# Altium PCB nrf52840_bma250e.PcbDoc
Units mil, origin at the board's own origin, x right, y up, seen from the top; angles counter-clockwise.
Board outline 2305 x 782 mil, 2 copper layers (Top Layer, Bottom Layer), stack 12.8 mil thick; 27 components, 63 nets, 155 pads, 88 vias.
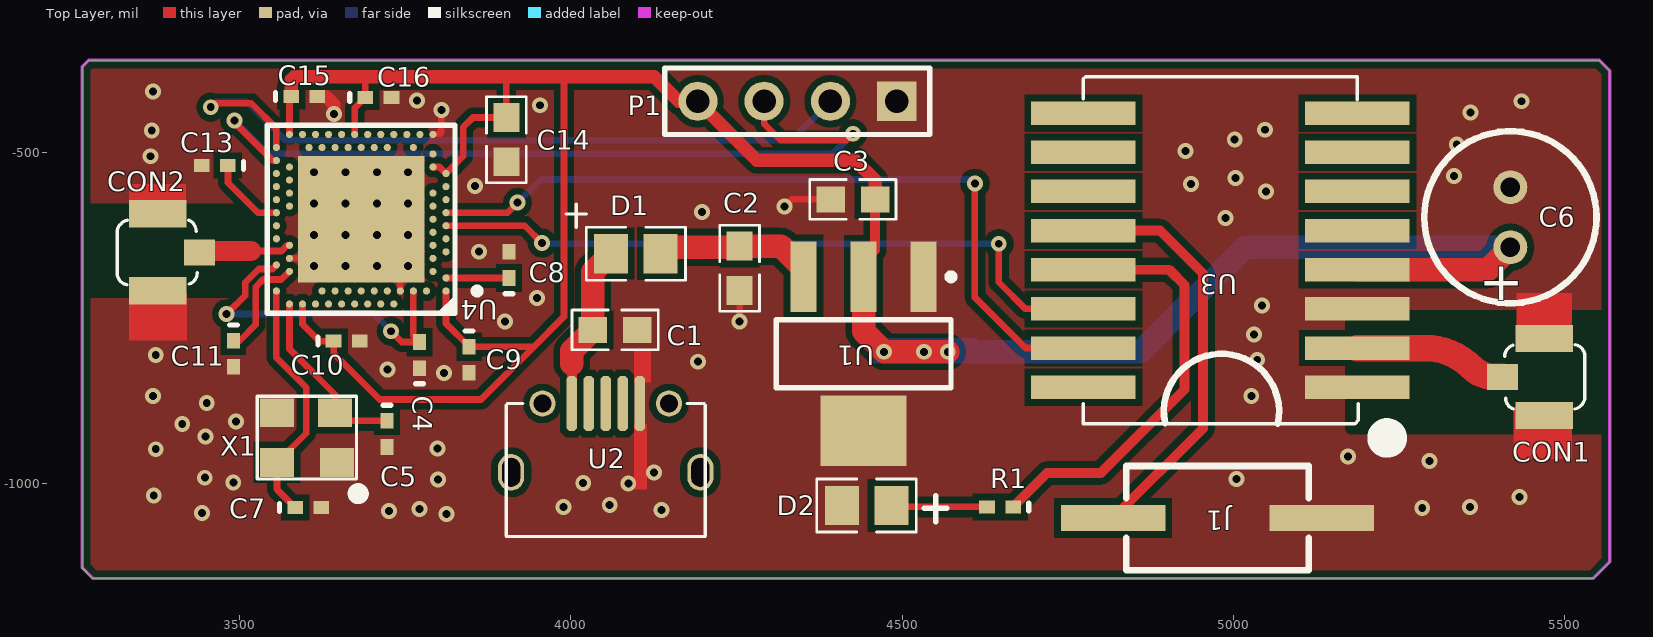
[diagram p0: Top Layer view]
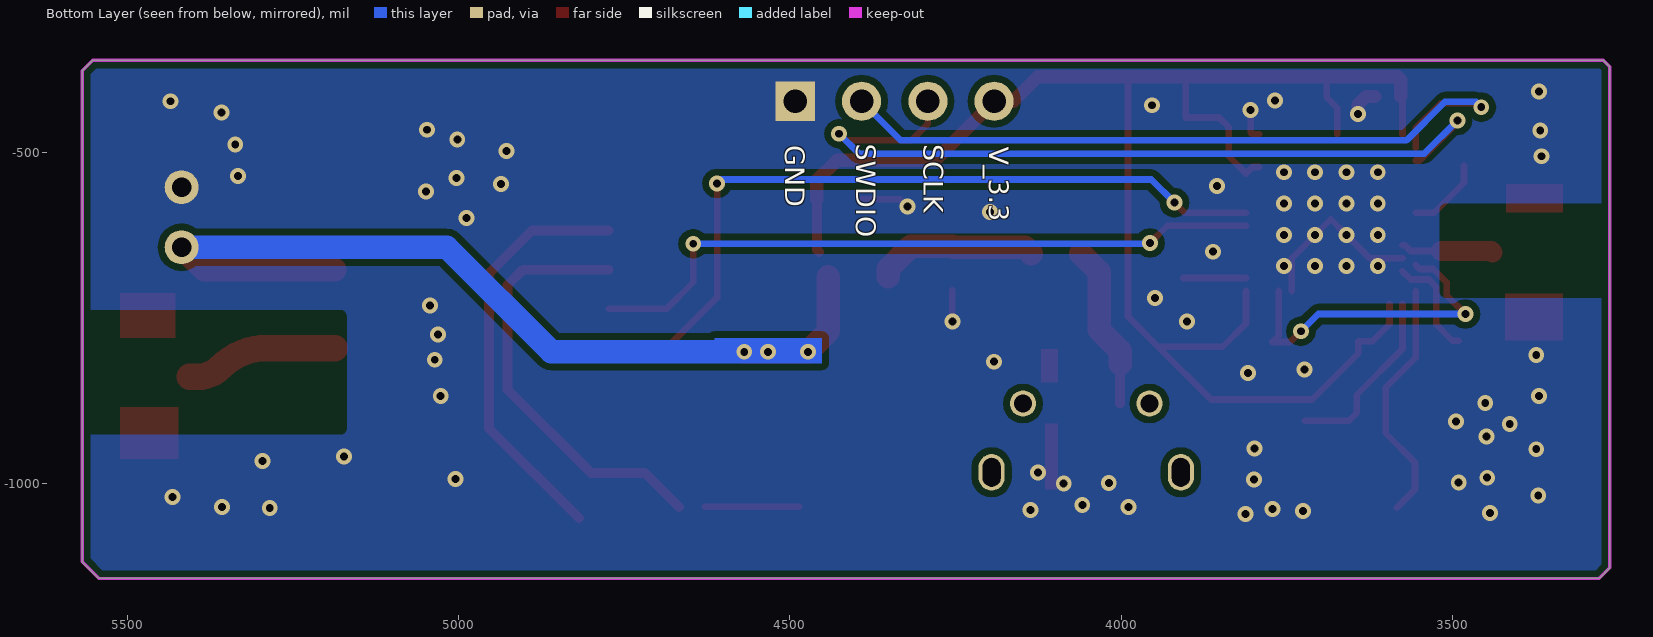
[diagram p1: Bottom Layer view, seen from below]

## Layer stack, top to bottom
Top Layer: signal copper 1.4
Dielectric: core 10, FR-4, Dk 4.2
Bottom Layer: signal copper 1.4

## Board outline
3263,-1127 3263,-371 3273,-361 5552,-361 5568,-377 5568,-1118 5543,-1143 3279,-1143

## Design rules (kind name [scope] priority, off if disabled: settings)
Clearance [All] p1: gap=6
ComponentClearance [All] p1 off: gap=10 collisioncheckmode=3 verticalgap=10 showdistances=FALSE
Height [All] p1 off: minheight=0 maxheight=1000 prefheight=500
MinimumSolderMaskSliver [All] p1 off: minsoldermaskwidth=10
NetAntennae [All] p1 off: netantennaetolerance=0
PlaneConnect [All] p1: planeconnectstyle=Direct reliefexpansion=20 reliefentries=4 reliefconductorwidth=10 reliefairgap=10
PolygonConnect [All] p1: connectstyle=Direct reliefconductorwidth=10 reliefentries=4 polygonreliefangle="90 Angle"
RoutingVias [All] p1: holewidth=28 width=50 viastyle="Through Hole" minholewidth=28 minwidth=50 maxholewidth=28 maxwidth=50
SilkToSilkClearance [All] p1 off: silktosilkclearance=10
SilkscreenOverComponentPads SilkToSolderMaskClearance [IsPad] p1 off: minsilkscreentomaskgap=10
SolderMaskExpansion [All] p1: expansion=4
Width [All] p1: maxlimit=100 minlimit=1 preferedwidth=10 minimp=50.000000 maximp=50.000000 favimp=50.000000
21 further rules are at their usual default settings.

## Components (designator, comment, footprint, x,y, rotation, side; value= is the part's Value field where it differs from the comment)
C1 "2.2uF" 0603-1 4067,-768 r0 top
C2 "1uF" 0603-1 4255,-675 r270 top
C3 "1uF" 0603-1 4426,-571 r180 top
C4 "1.0μF" 0402-A 3772,-806 r90 top
C5 "12pF" 0402-A 3723,-925 r270 top
C6 "100uf/25V" C_6.5_12.5_2.2_0.5 5418,-598 r270 top
C7 "12pF" 0402-A 3604,-1036 r0 top
C8 "100nF" 0402-A 3907,-670 r90 top
C9 "1.0μF" 0402-A 3847,-813 r270 top
C10 "100nF" 0402-A 3662,-785 r0 top
C11 "100pF" 0402-A 3491,-804 r270 top
C13 "820pF" 0402-A 3463,-520 r180 top
C14 "4.7μF" 0603-1 3903,-481 r270 top
C15 "100nF" 0402-a 3598,-416 r0 top
C16 "100nF" 0402-a 3710,-417 r0 top
CON1 "SMA/UFLR" IPX_U.FL 5469,-839 r180 top
CON2 "SMA/UFLR" IPX_U.FL 3377,-651 r0 top
D1 "Diode 1N4148" 0805-1 4061,-653 r0 top
D2 "LED/RED" 0805-1 4484,-1033 r180 top
J1 "KEY" BUTTON_1 4976,-1052 r180 top
P1 "Header 4" HDR1X4 4492,-423 r180 top
R1 "500R" 0402-a 4648,-1035 r180 top
U1 "AMS1117-3.3" SOT223_M 4442,-804 r270 top
U2 "USB_Micro" usb_micro 4053,-879 r180 top
U3 "HC-25_wifi" HC-25 5187,-441 r180 top
U4 "nRF52840-QIAA" AQFN50P700X700X85_HS-74N 3684,-601 r180 top
X1 "32MHz" SMD3225 3557,-968 r0 top

## Footprints (in the part's own frame and the unit in brackets; to place one, negate y for a bottom-side part, rotate by r counter-clockwise, add the part's x,y. Pads: shape width x height; smd on the part's side, far side on the other; paste and mask are expansions set on the pad)
0402-A [mm] "Chip Inductor; Body 1 x 0.5 mm (LxW typ)"
  rect 0.6x0.5 smd: 1(-0.5,0) 2(0.5,0)
  silkscreen extent -1.1,-0.15 -1.1,0.15
0402-a [mm] "Chip Inductor; Body 1 x 0.5 mm (LxW typ)"
  rect 0.6x0.5 smd: 1(-0.5,0) 2(0.5,0)
  silkscreen extent -1.1,-0.15 -1.1,0.15
0603-1 [mm]
  rect 1.1x1 smd: 1(-0.85,0) 2(0.85,0)
  silkscreen extent -1.65,-0.76 1.65,0.76, body extent -1.14,-0.38 1.14,0.38, height 1
0805-1 [mm]
  rect 1.3x1.5 smd: 1(0,0) 2(1.9,0)
  silkscreen extent -1.72,-1.02 2.85,1.91
AQFN50P700X700X85_HS-74N [mm]
  rect 4.85x4.85 smd mask+0.05: 74(0,0)
  round 0.275 smd paste+0.012 mask+0.05: A8(-1.25,3.25) A10(-0.75,3.25) A12(-0.25,3.25) A14(0.25,3.25) A16(0.75,3.25) A18(1.25,3.25) A20(1.75,3.25) A22(2.25,3.25) A23(2.75,3.25) AA24(3.25,-2.25) AB2(-2.75,-2.5) AC5(-2,-2.75) AC9(-1,-2.75) AC11(-0.5,-2.75) AC13(0,-2.75) AC15(0.5,-2.75) AC17(1,-2.75) AC19(1.5,-2.75) AC21(2,-2.75) AC24(3.25,-2.75) AD2(-2.75,-3.25) AD4(-2.25,-3.25) AD6(-1.75,-3.25) AD8(-1.25,-3.25) AD10(-0.75,-3.25) AD12(-0.25,-3.25) AD14(0.25,-3.25) AD16(0.75,-3.25) AD18(1.25,-3.25) AD20(1.75,-3.25) AD22(2.25,-3.25) AD23(2.75,-3.25) B1(-3.25,2.75) B3(-2.5,2.75) B5(-2,2.75) B7(-1.5,2.75) B9(-1,2.75) B11(-0.5,2.75) B13(0,2.75) B15(0.5,2.75) B17(1,2.75) B19(1.5,2.75) B24(3.25,2.75) C1(-3.25,2.25) D2(-2.75,2) D23(2.75,2) E24(3.25,1.75) F2(-2.75,1.5) F23(2.75,1.5) G1(-3.25,1.25) H2(-2.75,1) H23(2.75,1) J1(-3.25,0.75) J24(3.25,0.75) K2(-2.75,0.5) L1(-3.25,0.25) L24(3.25,0.25) M2(-2.75,0) N1(-3.25,-0.25) N24(3.25,-0.25) P2(-2.75,-0.5) P23(2.75,-0.5) R1(-3.25,-0.75) R24(3.25,-0.75) T2(-2.75,-1) T23(2.75,-1) U1(-3.25,-1.25) U24(3.25,-1.25) V23(2.75,-1.5) W1(-3.25,-1.75) W24(3.25,-1.75) Y2(-2.75,-2) Y23(2.75,-2)
  silkscreen extent -4.57,-3.6 3.6,3.6, body extent -3.55,-3.55 3.55,3.55, height 0.85
BUTTON_1 [mm]
  rect 4x1 smd: 1(-4,0) 2(4,0)
  silkscreen extent -3.5,-2 3.5,2
C_6.5_12.5_2.2_0.5 [mm]
  round 1.3 hole 0.75: 1(1.15,0) 2(-1.15,0)
  silkscreen extent -3.3,-3.3 3.3,3.3
HC-25 [mm]
  rect 4x0.9 smd: 1(0,10.5) 2(0,9) 3(0,7.5) 4(0,6) 5(0,4.5) 6(0,3) 7(0,1.5) 8(0,0) 9(10.5,0) 10(10.5,1.5) 11(10.5,3) 12(10.5,4.5) 13(10.5,6) 14(10.5,7.5) 15(10.5,9) 16(10.5,10.5)
  silkscreen extent -1.5,-1.4 10.5,12.8
HDR1X4 [mm] "Connector; Header; 4 Position"
  rect 1.5x1.5 hole 0.9: 1(0,0)
  round 1.5 hole 0.9: 2(2.54,0) 3(5.08,0) 4(7.62,0)
  silkscreen extent -1.27,-1.27 8.89,1.27
IPX_U.FL [mm]
  rect 1.2x1 smd: 1(1.6,0)
  rect 2.2x1.05 smd: 2(0,-1.475) 3(0,1.475)
  silkscreen extent -1.55,-1.24 1.51,1.23
SMD3225 [mm]
  rect 1.3x1.1 smd: 1(0,0) 2(2.3,0) 3(2.23,1.9) 4(0,1.9)
  silkscreen extent -0.76,-1.32 3.24,2.54
SOT223_M [mm] "SOT223, 4-Leads, Body 6.5x3.5mm, Pitch 2.3mm, Lead Span 7mm, IPC Low Density"
  rect 2.7x1 smd: 1(-2.95,2.3) 2(-2.95,0) 3(-2.95,-2.3)
  rect 2.7x3.3 smd: 4(2.95,0)
  silkscreen extent -3.07,-3.35 1.3,3.48, body extent -1.85,-3.35 1.85,3.35, height 1.7
usb_micro [mm] "USB方?"
  oval 1x1.4 hole 0.7 slot 1.1 at 90 deg: 0(-3.625,2.638) 0(3.625,2.638)
  round 1 hole 0.7: 0(-2.425,0) 0(2.425,0)
  oct 0.4x2.1 smd: 1(1.3,0) 2(0.65,0) 3(0,0) 4(-0.65,0) 5(-1.3,0)
  silkscreen extent -3.81,0 3.81,5.1

## Part data
C1 C2 C3: library part CAP-0.1UF, "SMD-"
C4 C9: library part C0603-1?, "Capacitor, X7R, ±10%"
C5 C7: library part C0402-12p, "Capacitor, NP0, ±2%"
C6: library part "Cap Pol1", "Polarized Capacitor (Radial)"
C8 C10 C15 C16: library part C0402-100n, "Capacitor, X7R, ±10%"
C11: library part C0402-100p, "Capacitor, NP0, ±5%"
C13: library part C0402-820p, "Capacitor, NP0, ±5%"
C14: library part C0603-4μ7-, "Capacitor, X7R, ±10"
D1: "High Conductance Fast Diode"
D2: library part LED/0603
P1: "Header, 4-Pin"
R1: library part R
U1: library part MCP170
U4: library part nRF52840-QIAAD0, "Multi-protocol Bluetooth Low Energy, IEEE 802.15.4, ANT and 2.4GHz proprietary system-on-chip"
X1: library part XTAL_SMD2016_32MHz_8pF_General, "XTAL SMD 2016, 32MHz, Cl=8pF, Total Tol: ±40ppm"

## Via types
v1: diameter 24, hole 12, Top Layer to Bottom Layer, 88 vias

## Nets (pads, with @x,y where several pads share a name; then routed paths per layer and width w, separated by ;. In a path a pad name is that pad's centre, name@x,y a point inside that pad or via, vN(x,y) a via of type N, cw(c..) or ccw(c..) an arc to the next point about the centre after c; other vN are vias at no path point)
DEC1: C8.1 U4.C1 | length 94.9
  Top Layer w10: U4.C1 C8.1@3906.9,-689.58
DEC3: C11.1 U4.D23 | length 161.4
  Top Layer w10: C11.1 3500.69,-784.32 3525,-760 3525,-703 3536,-692 3563.47,-692 U4.D23
DEC4_6: C4.2 U4.B5 U4.E24 | length 506.6
  Top Layer w10: v1(3481,-744) 3509,-716 3509,-696.37 3529.37,-676 3549.94,-676 U4.E24 ; v1(3729,-770) 3745.31,-786.31 C4.2 3762.74,-777.05 U4.B5
  Bottom Layer w10: v1(3481,-744) 3703,-744 v1(3729,-770)
GND: C1.2 C2.2 C3.2 C4.1 C5.2 C6.2 C7.2 C8.2 C9.2 C10.2 C11.2 C13.2 C14.2 C15.2 C16.2 CON1.2 CON1.3 CON2.2 CON2.3 D2.2 J1.1 P1.1 U1.1 U1.4 U2.5 U3.1 U3.3 U4.74 U4.AD2 U4.B7 U4.F23 X1.2 X1.4 | length 478.4
  Top Layer w10: U4.F23 3624.94,-660.06 v1(3660.38,-624.62) U4.74 3743.06,-660.06 U4.B7 ; U4.AD2 3801.95,-473.05 3805,-470 v1(3805,-436) ; v1(4255,-755) C2.2 ; v1(4323,-582) 4334,-571 C3.2
  Top Layer w20: C15.2 3631,-416 3643,-428 v1(3643,-442)
  other v1: 3813,-1046 3444,-1044 3726,-1041 4137,-1040 3772,-1038 5285,-1037 3989,-1035 5357,-1035 4059,-1032 5432,-1020 3371,-1018 4087,-1000 4019,-999 3491,-998 3800,-994 5005,-993 3448,-991 4126,-983 5296,-966 5173,-959 3374,-948 3799,-947 3449,-929 3414,-910 3495,-906 3451,-878 3370,-868 5027,-868 3809,-833 3724,-828 4192,-816 5036,-813 3374,-806 5031,-775 3901,-755 5043,-731 3949,-720 3613.13,-671.87 3660.38,-671.87 3707.62,-671.87 3754.87,-671.87 3862,-650 3613.13,-624.62 3707.62,-624.62 3754.87,-624.62 4988,-599 4198,-590 3613.13,-577.38 3660.38,-577.38 3707.62,-577.38 3754.87,-577.38 5049,-559 3856,-551 4936,-548 5003,-539 5333,-536 3613.13,-530.13 3660.38,-530.13 3707.62,-530.13 3754.87,-530.13 3366,-506 4928,-498 5337,-488 5002,-481 3368,-467 5048,-466 5358,-440 3954,-429 5435,-423 3768,-422 3370,-408
NetC13_1: C13.1 U4.N24 | length 117.1
  Top Layer w10: C13.1@3483,-520.68 3483,-546 3528.16,-591.16 U4.N24
NetCON1_1: CON1.1 U3.2 | length 230.7
  Top Layer w40: U3.2 5288.91,-795.33 cw(c5288.91,-895.33) 5359.62,-824.62 ccw(c5394.34,-789.9) 5394.34,-839 CON1.1
NetCON2_1: CON2.1 U4.H23 | length 140.1
  Top Layer w10: 3518,-649 3563.58,-649 3572.21,-640.37 U4.H23
  Top Layer w30: CON2.1 3441.99,-649 3489,-649 3518,-649
NetD2_1: D2.1 R1.2 | length 142.3
  Top Layer w10: D2.1@4486,-1035 R1.2
NetJ1_2: J1.2 U3.12 | length 632.4
  Top Layer w15: U3.12 4889.17,-618.17 4954,-683 4954,-916.52 J1.2
NetR1_1: R1.1 U3.13 | length 651.5
  Top Layer w15: R1.1 4718.69,-984 4800,-984 4926,-858 4926,-700 4903.22,-677.22 U3.13
NRF52840_RX: U3.15 U4.N1 | length 1188.5
  Top Layer w10: U4.N1 3904.84,-591.16 v1(3920,-576) ; v1(4610,-547) 4610,-719 4686.33,-795.33 U3.15
  Bottom Layer w10: v1(3920,-576) 3955,-541 4604,-541 v1(4610,-547)
NRF52840_TX: U3.14 U4.L1 | length 1047.6
  Top Layer w10: U4.L1 3930.84,-610.84 v1(3957,-637) ; v1(4646,-638) 4646,-696 4686.28,-736.28 U3.14
  Bottom Layer w10: v1(3957,-637) 3958,-638 v1(4646,-638)
P0.02/AIN0: U4.A12
P0.03/AIN1: U4.B13
P0.04/AIN2: U4.J1
P0.05/AIN3: U4.K2
P0.07: U4.M2
P0.09/NFC1: U4.L24
P0.10/NFC2: U4.J24
P0.11: U4.T2
P0.12: U4.U1
P0.13: U4.AD8
P0.14: U4.AC9
P0.15: U4.AD10
P0.16: U4.AC11
P0.17: U4.AD12
P0.18/RESET: U4.AC13
P0.19: U4.AC15
P0.20: U4.AD16
P0.21: U4.AC17
P0.22: U4.AD18
P0.23: U4.AC19
P0.24: U4.AD20
P0.25: U4.AC21
P0.26: U4.G1
P0.27: U4.H2
P0.28/AIN4: U4.B11
P0.29/AIN5: U4.A10
P0.30/AIN6: U4.B9
P0.31/AIN7: U4.A8
P1.00: U4.AD22
P1.01: U4.Y23
P1.02: U4.W24
P1.03: U4.V23
P1.04: U4.U24
P1.05: U4.T23
P1.06: U4.R24
P1.07: U4.P23
P1.08: U4.P2
P1.09: U4.R1
P1.10: U4.A20
P1.11: U4.B19
P1.12: U4.B17
P1.13: U4.A16
P1.14: U4.B15
P1.15: U4.A14
SWDCLK: P1.3 U4.AA24 | length 1238.5
  Top Layer w10: v1(3493,-452) 3493,-455 3550.42,-512.42 U4.AA24 ; P1.3 4292,-457 4317,-482 4416,-482 v1(4426,-472)
  Bottom Layer w10: v1(3493,-452) 3543,-502 4396,-502 v1(4426,-472)
SWDIO: P1.2 U4.AC24 | length 1132.8
  Top Layer w10: v1(3457,-432) 3463,-426 3518,-426 3556.05,-464.05 U4.AC24
  Bottom Layer w10: v1(3457,-432) 3465,-424 3512,-424 3570,-482 4333,-482 P1.2
VBUS_5V: C1.1 D1.1 U2.1 | length 250.5
  Top Layer w15: U2.1 4001.82,-819
  Top Layer w35.43: 4001.82,-819 4001.82,-799.72 C1.1 4033.54,-680.46 D1.1
VCC_33: C3.1 C6.1 C9.1 C10.1 C14.1 C15.1 C16.1 P1.4 U1.2 U3.4 U4.A22 U4.AD14 U4.AD23 U4.B1 U4.W1 U4.Y2 | length 3943.7
  Top Layer w10: U4.AD23 3575.73,-418.58 C15.1 ; U4.A22 3595.42,-759.42 3621,-785 C10.1 3642.31,-803.32 3712,-873 3865,-873 3944.69,-793.32 ; U4.AD14 3674.16,-433.16 C16.1 3690.31,-386.68 ; U4.Y2 3802.11,-522.26 U4.W1 3838,-506.05 3838,-462 3852.46,-447.54 C14.1 3903,-388 ; U4.B1 3811.95,-758.27 C9.1 3944.69,-793.32 ; 3989,-386 3990,-387 3990,-748 3944.69,-793.32
  Top Layer w15: U1.2@4456.26,-650.6 4459.46,-647.39 C3.1
  Top Layer w20: C15.1 3578.31,-390.68 3583,-386 3989,-386 4126,-386 4163,-423 P1.4 4281,-512 4429,-512 4459.46,-542.46 C3.1
  Top Layer w35.43: U1.2 4442,-770 v1(4473,-801) v1(4533,-801) v1(4569,-801) ; U3.4 5384.06,-677.22 C6.1
  Bottom Layer w35.43: v1(4569,-801) 4860,-801 5017.72,-643.28 C6.1
VCC_43: C2.1 D1.2 U1.3 | length 246.7
  Top Layer w35.43: D1.2 4145.8,-643 4253.54,-643 C2.1 4317.28,-641.54 4351.45,-675.71 U1.3
XC1: C7.1 U4.B24 X1.1 | length 374.9
  Top Layer w10: U4.B24 3556.05,-810.05 3601,-855 3601,-924 X1.1 3557,-1008.68 C7.1
XC2: C5.1 U4.A23 X1.3 | length 276.1
  Top Layer w10: U4.A23 3575.73,-796.73 3644.8,-865.8 X1.3 3656.91,-905.32 C5.1
pads on no net: U2.0 U2.2 U2.3 U2.4 U3.5 U3.6 U3.7 U3.8 U3.9 U3.10 U3.11 U3.16 U4.A18 U4.AB2 U4.AC5 U4.AD4 U4.AD6 U4.B3 U4.D2 U4.F2

## Polygon pours and split planes (outlines as drawn)
GND on Top Layer "Bottom Layer-No Net 1" (solid, remove dead copper, pour order 6): 3165,-244 3173,-236 5899,-236 5899,-1250 5755,-1394 5720,-1359 2951,-1359
GND on Bottom Layer "Bottom Layer-No Net 1" (solid, remove dead copper, pour order 8): 3060,-201 6496,-201 6504,-209 6234,-479 6234,-1629 3056,-1629 2982,-1555

## Keep-outs
Keep-Out Layer:
  lines w5: 3263,-1127 3263,-1041 3263,-396 3263,-371 3273,-361 5490,-361 5552,-361 5568,-377 5568,-1118 5543,-1143 3279,-1143 3263,-1127

## Other copper
Top Layer:
  rectangle net GND: 5423,-963 5511,-884
  rectangle net GND: 5427,-780 5511,-712
  rectangle net GND: 3334,-591 3420,-548
  rectangle net GND: 3334,-784 3421,-713
  rectangle net GND: 4096,-1009 4115,-909
  rectangle net GND: 4096,-847 4121,-797
Bottom Layer:
  rectangle net VCC_33: 4452,-819 4614,-780

## Silkscreen, mask and mechanical layers (free items; w line width, h text height)
Bottom Overlay:
  text "SWDIO" at 4400,-487 h30 r90
  text "SCLK" at 4298,-488 h30 r90
  text "GND" at 4507,-489 h30 r90
  text "V_3.3" at 4199,-492 h30 r90
Top Solder:
  rectangle: -1102.36,-85 -349,263.78
Bottom Solder:
  rectangle: -1102.36,-85 -382,263.78

## Text inside footprints (layer, text, board x,y; h text height)
C6: Top Overlay "+" at 5438,-723 h59.06